# EAGLE board hub (EAGLE 9.6.2)
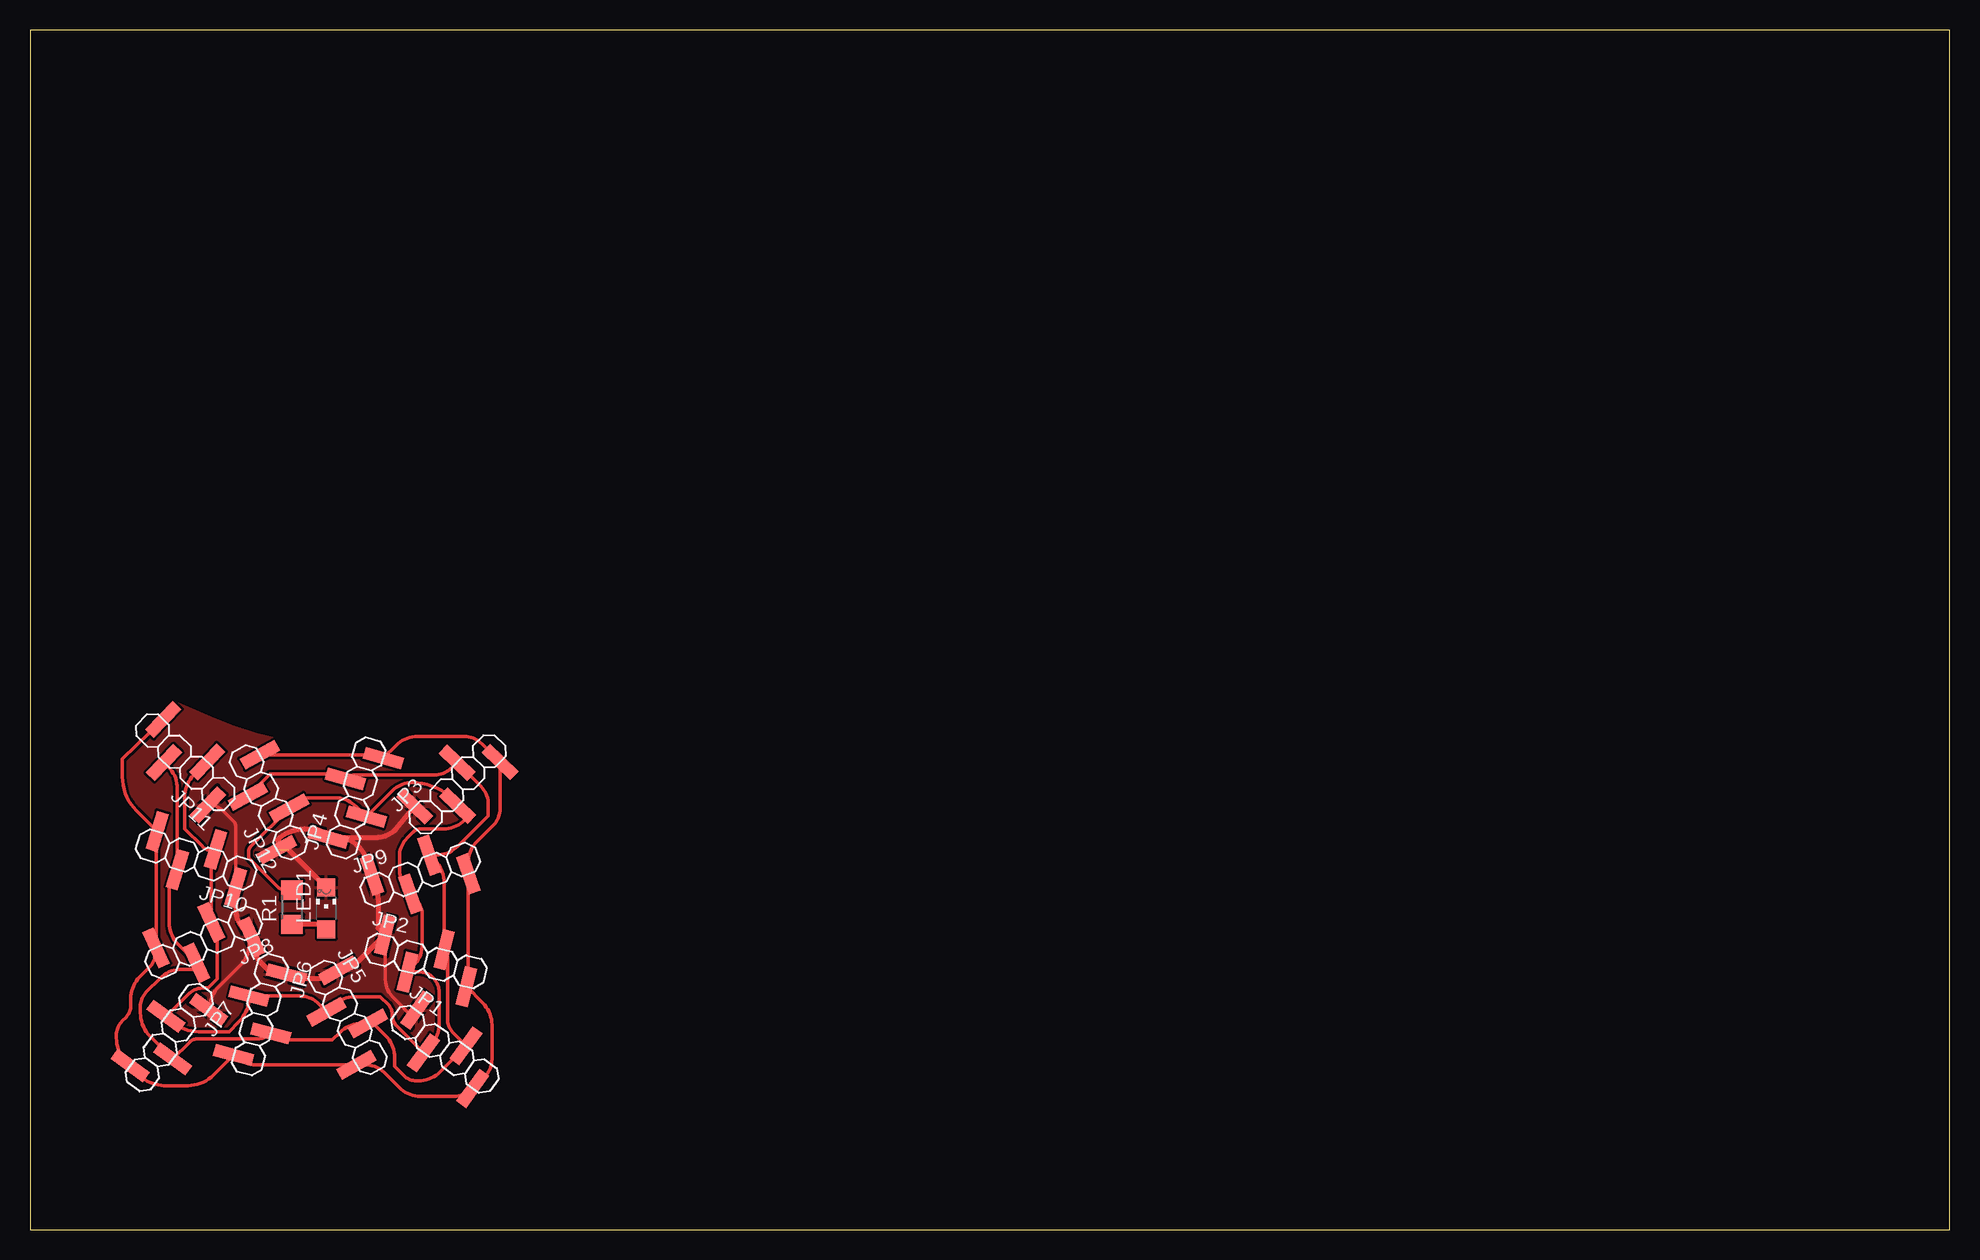
[diagram p0: board, top side]

Size 160 x 100 mm. Coordinates in mm from the lower left corner, seen from the top.
Outline: 0,0 160,0 160,100 0,100 0,0
Copper layers (1*16): Top 0.035mm / dielectric 1.5mm / Bottom 0.035mm
Design rules "default *": minimum track width 6mil, minimum drill 0.35mm, track to track 8mil, track to pad 8mil, pad to pad 8mil, via to via 8mil, smd to smd 8mil, copper to edge 40mil, drill to drill 6mil, minimum pad ring 10mil, minimum via ring 8mil, stop-mask expansion 4mil, vias tented up to drill 0mil, thermal gap 10mil

## Footprints (pad centres in the part's own frame; a part is rotated, then mirrored left to right if it is on the bottom)
1X04SMD = smd 1.016 x 3.302: 1 -1.27,1.27; 2 1.27,-1.27; 3 3.81,1.27; 4 6.35,-1.27
CHIPLED_1206 = smd 1.5 x 1.5: A 0,-1.75; C 0,1.75
R1206 = smd 1.6 x 1.803: 1 -1.422,0; 2 1.422,0

## Placement (x,y rotation side)
JP1  [1X04SMD]  32.51,16.51 324.1 top
JP2  [1X04SMD]  30.52,23.01 346.1 top
JP3  [1X04SMD]  33.86,35.3 46 top
JP4  [1X04SMD]  26.46,33.55 73.8 top
JP5  [1X04SMD]  25.21,19.89 299.4 top
JP6  [1X04SMD]  19.81,20.37 255.3 top
JP7  [1X04SMD]  13.11,18.05 233.9 top
JP8  [1X04SMD]  16.8,25 204.9 top
JP9  [1X04SMD]  30.11,28.76 19.2 top
JP10  [1X04SMD]  16.3,30.1 162.9 top
JP11  [1X04SMD]  14.8,37.2 136.1 top
JP12  [1X04SMD]  21.1,33.4 118.7 top
LED1  [CHIPLED_1206]  24.69,26.77 0 top
R1  [R1206]  21.83,26.87 90 top

## Library data of the parts
JP1-JP12 = pinhead-2
LED1 = led
R1 = rcl; SPICEPREFIX: R

## Nets
GND: JP1.1 JP2.1 JP3.1 JP4.1 JP5.1 JP6.1 JP7.1 JP8.1 JP9.1 JP10.1 JP11.1 JP12.1 LED1.C
N$1: JP1.3 JP2.3 JP3.3 JP4.3 JP5.3 JP6.3 JP7.3 JP8.3 JP9.3 JP10.3 JP11.3 JP12.3
N$2: JP1.4 JP2.4 JP3.4 JP4.4 JP5.4 JP6.4 JP7.4 JP8.4 JP9.4 JP10.4 JP11.4 JP12.4
N$3: LED1.A R1.1
VCC: JP1.2 JP2.2 JP3.2 JP4.2 JP5.2 JP6.2 JP7.2 JP8.2 JP9.2 JP10.2 JP11.2 JP12.2 R1.2

## Tracks (layer width: path | path; a pad name or v marks a point on that pad's centre or on a via)
GND  (2 unrouted)
  Top 0.305: JP2.1 29.59,21.06 arc45 30.34,19.26 31.9,17.7 32.04,17.84 arc45 JP1.1 | 14.88,18.79 JP7.1 14.98,18.43 arc-45 15.73,20.23 17.54,22.04 arc45 18.29,23.84 18.29,24.27 | JP10.1 17.14,33.66 arc45 17,34 16.13,34.87 arc45 JP11.1 | JP12.1 20.6,32.46
  Top 0.406: 24.24,28.97 LED1.C 21.57,31.64 | 20.6,32.46 arc-45 22.87,33.4 23.5,33.4 arc-45 24.64,32.93 JP4.1 | JP4.1 arc45 25.33,32.5 26.2,32.5 | 25.75,32.69 arc-45 26.2,32.5 | JP4.1 25.75,32.69 | 25.75,32.69 arc-45 26.2,32.5 | JP4.1 25.65,32.69 arc-45 27.3,32 27.35,31.95 arc-45 28.24,29.79 JP9.1 28.49,28.81 arc-45 29,27.58 29,25.14 JP2.1 29.55,24.55 27.2,22.2 arc-45 25.8,21.62 JP5.1 arc-45 23.95,20.9 21.9,20.9 arc-45 20.7,21.39 20.7,21.4 21.06,21.4 arc-45 JP6.1 20.54,21.28 arc-45 20,21.5 19.1,22.4 | JP4.1 28.81,32.69 arc45 30.51,33.39 JP3.1 | 19.03,22.47 18.69,23.3 18.49,23.78 | 18.49,23.78 18.39,24.02 arc-45 18.29,24.27 | 18.49,23.78 JP8.1 17.8,25.07 arc-45 17.2,26.52 17.2,28.51 JP10.1
  pour Top: 42.32,41.39 42.68,43.35 41.92,45.12 39.99,45.47 38.04,44.99 36.18,44.25 34.35,43.43 32.51,42.63 30.64,41.9 28.73,41.29 26.77,40.85 24.78,40.63 22.77,40.65 20.79,40.91 18.83,41.37 16.93,41.99 15.06,42.72 13.22,43.52 11.39,44.33 9.53,45.08 7.6,45.63 5.62,45.52 4.52,43.96 4.72,41.97 5.38,40.08 6.19,38.24 7.02,36.42 8.27,33.47 9,30.75 9.32,28.77 9.39,26.76 9.22,24.77 8.82,22.8 8.25,20.88 7.55,19 6.76,17.16 5.94,15.32 5.15,13.48 4.5,11.59 4.23,9.61 5.09,7.87 7.01,7.53 8.93,8.11 10.75,8.95 12.57,9.8 14.41,10.59 16.3,11.26 18.24,11.79 20.21,12.15 22.2,12.35 24.21,12.37 26.21,12.22 28.19,11.9 30.14,11.42 32.04,10.77 33.89,10 35.7,9.14 37.5,8.25 39.36,7.51 41.33,7.46 42.5,8.98 42.41,10.97 41.82,12.89 41.05,14.74 40.23,16.57 39.44,18.41 38.73,20.29 38.15,22.21 37.77,24.18 37.62,26.18 37.71,28.18 38.04,30.16 38.56,32.1 39.22,33.99 39.99,35.84 40.81,37.67 41.61,39.51
N$1
  Top 0.305: JP10.3 12.23,29.95 arc-45 12,29.4 | JP10.3 12.27,30 arc45 11.6,28.37 11.6,25.57 arc45 12.34,23.78 JP8.3 13.88,21.89 arc45 13.8,21.7 12.65,21.7 arc45 10.86,20.96 9.7,19.8 arc45 9.2,18.6 9.2,18.07 arc45 10.02,16.1 JP7.3 13.29,15.62 arc-45 13.96,15.9 18.95,15.9 arc45 JP6.3 arc45 21.43,15.8 25.2,15.8 25.85,16.45 arc-45 27.65,17.19 JP5.3 arc-45 28.9,16.9 29.66,16.14 arc-45 30.4,14.35 30.4,13.6 31.18,12.82 arc45 32.2,12.4 32.38,12.4 arc45 34.18,13.14 JP1.3 35.33,16.31 arc-45 34.8,17.6 34.8,22.66 arc45 JP2.3 34.52,28.93 arc45 33.78,30.72 JP9.3 33.86,31.21 arc45 35.66,31.96 38.2,34.5 38.2,35.46 arc45 37.6,36.92 JP3.3 35.17,38.5 arc-45 33.72,37.9 27.12,37.9 arc45 JP4.3 arc45 25.25,38 20.02,38 JP12.3 | JP11.3 11.54,38.56 arc-45 12.29,36.76 JP10.3
N$2
  Top 0.305: JP12.4 29.1,39.58 arc-45 29.21,39.54 JP4.4 30.51,40.36 arc-45 32.31,41.1 36.22,41.1 arc-45 37.67,40.5 JP3.4 39.19,35.05 arc-45 38.64,33.74 37.27,32.37 arc45 36.52,30.57 JP9.4 36.52,20.6 arc-45 JP2.4 37.76,18.88 arc-45 38.5,17.08 38.5,14.2 arc-45 37.9,12.75 JP1.4 arc-45 35.32,11.1 32.55,11.1 arc-45 30.76,11.84 29.5,13.1 arc45 27.97,13.73 JP5.4 18.84,13.73 arc-45 17.04,14.48 JP6.4 15.3,12.88 arc-45 13.17,12 11.16,12 arc-45 9.2,12.81 JP7.4 8.02,13.99 arc-45 7.2,15.96 7.2,16.2 arc-45 7.7,17.39 8,17.7 arc45 8.4,18.67 8.4,19.25 arc-45 9.14,21.04 9.9,21.8 arc45 10.51,23.26 JP8.4 10.51,33.08 JP10.4 8.87,34.92 arc-45 7.7,37.74 7.7,39.23 JP11.4
N$3
  Top 0.406: LED1.A 24.26,25.45 R1.1
VCC
  Top 0.305: 15.86,31.69 JP10.2 15.46,31.5 | R1.2 21.36,28.29 arc-45 20.59,28.61 18.23,30.97 18.23,31.5 arc-45 18.41,31.93 JP12.2 22.4,35.91 arc-45 22.6,36 25.4,36 arc-45 27.19,35.26 JP4.2 30.19,36.58 arc-45 31.83,37.26 arc-45 35.31,35.81 JP3.2 36.2,34.79 arc-45 36.4,34.3 36.24,34.14 arc-45 34.45,33.4 32.62,33.4 arc45 31.9,33.1 31.44,32.64 arc45 30.8,31.1 30.8,29.96 arc45 31.54,28.16 JP9.2 32.13,27.57 arc-45 32.7,26.2 32.7,23.78 arc-45 31.96,21.98 JP2.2 32.46,21.47 arc-45 33.6,21 arc-45 34.1,19.79 34.1,17.09 arc-45 33.36,15.3 JP1.2 30.6,16.93 arc-45 30.2,17.9 arc45 29.85,18.75 29.2,19.4 27.02,19.4 arc45 25.22,18.66 JP5.2 24.07,18.82 arc45 22.51,19.46 JP6.2 18.26,19.35 arc-45 17.41,17.32 16.6,16.5 14.04,16.5 arc-45 11.59,17.52 JP7.2 13.12,19.56 arc-45 14.55,20.15 14.85,20.15 15.6,20.9 15.6,24.44 arc45 JP8.2 15.11,30.53 arc-45 15.46,31.37 15.46,31.5 | JP11.2 13.64,37.87 arc45 12.9,36.08 12.9,33.4 14.33,31.97 arc45 15.46,31.5